# Altium PCB motor-60mm.PcbDoc
Units mm, origin at the board's own origin, x right, y up, seen from the top; angles counter-clockwise.
Board outline 60 x 60 mm, 2 copper layers (Top Layer, Bottom Layer), stack 1.591 mm thick; 22 components, 14 nets, 73 pads, 187 vias.
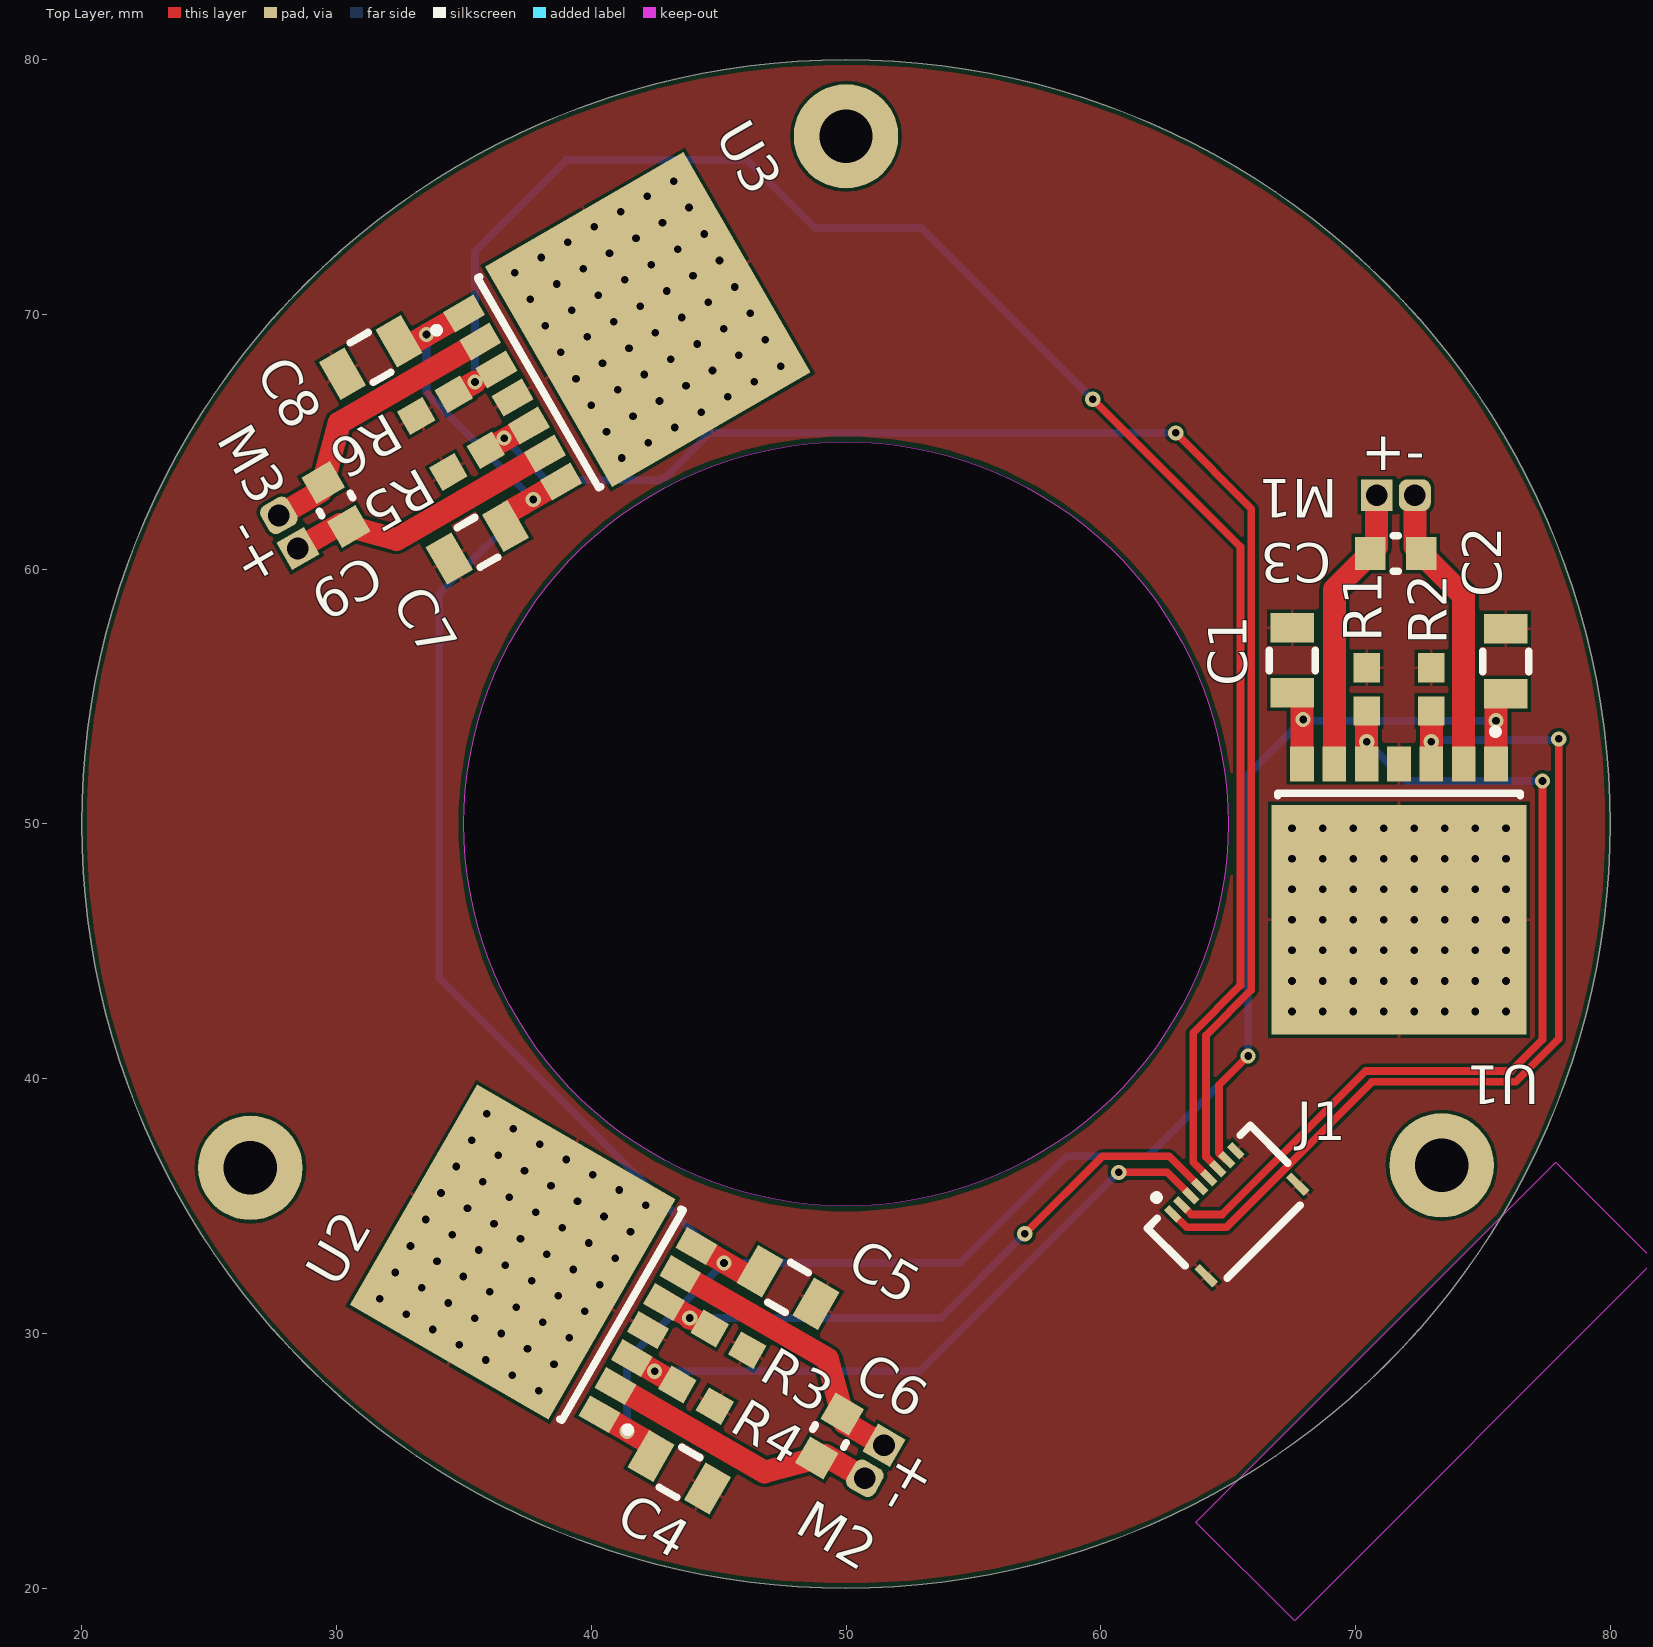
[diagram p0: Top Layer view]
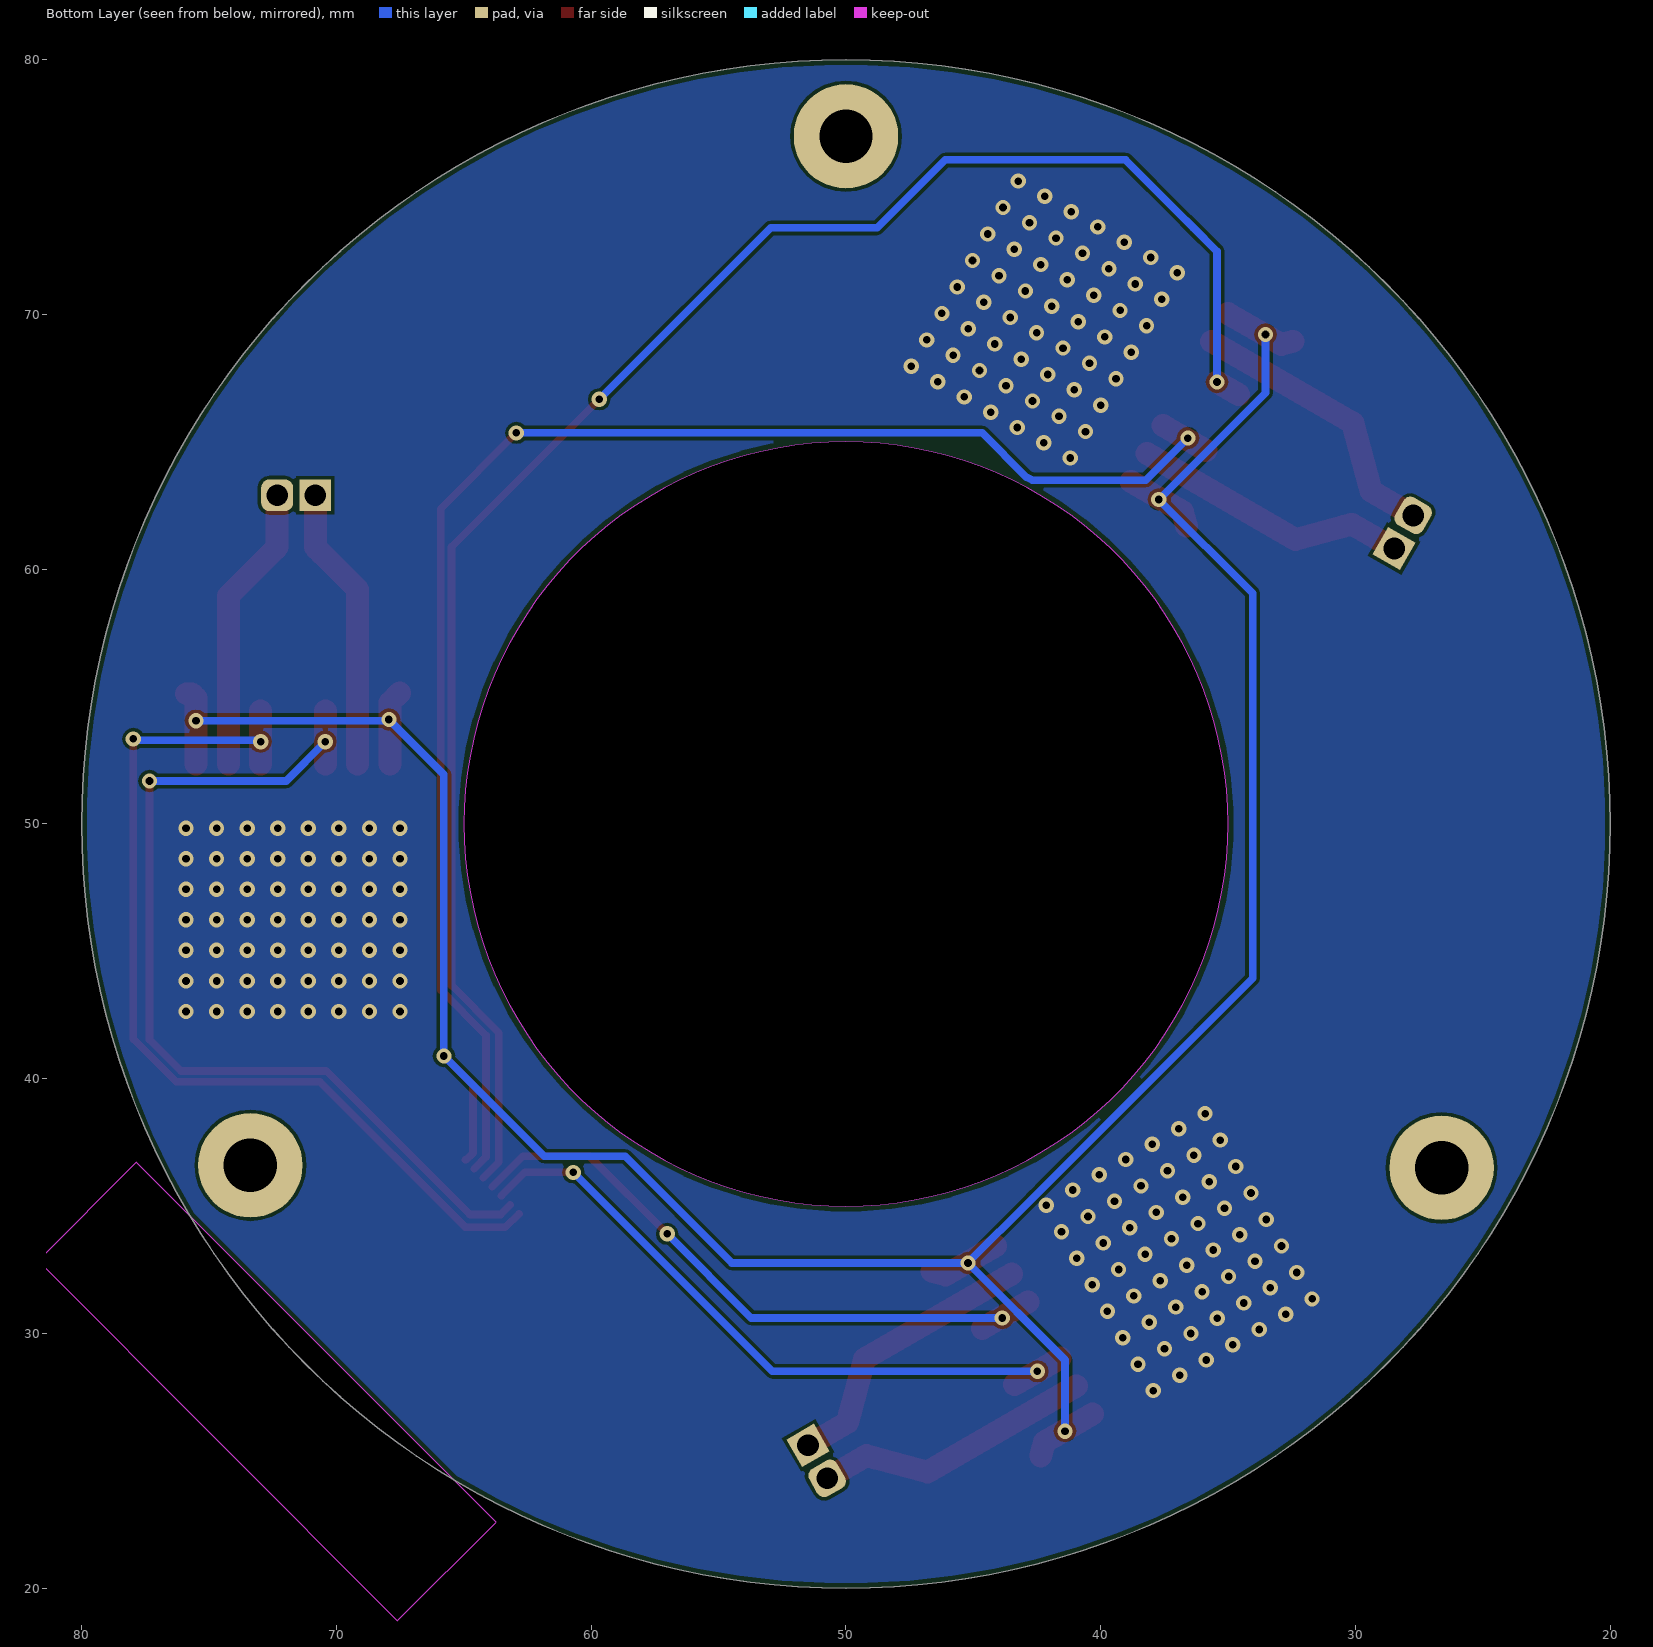
[diagram p1: Bottom Layer view, seen from below]
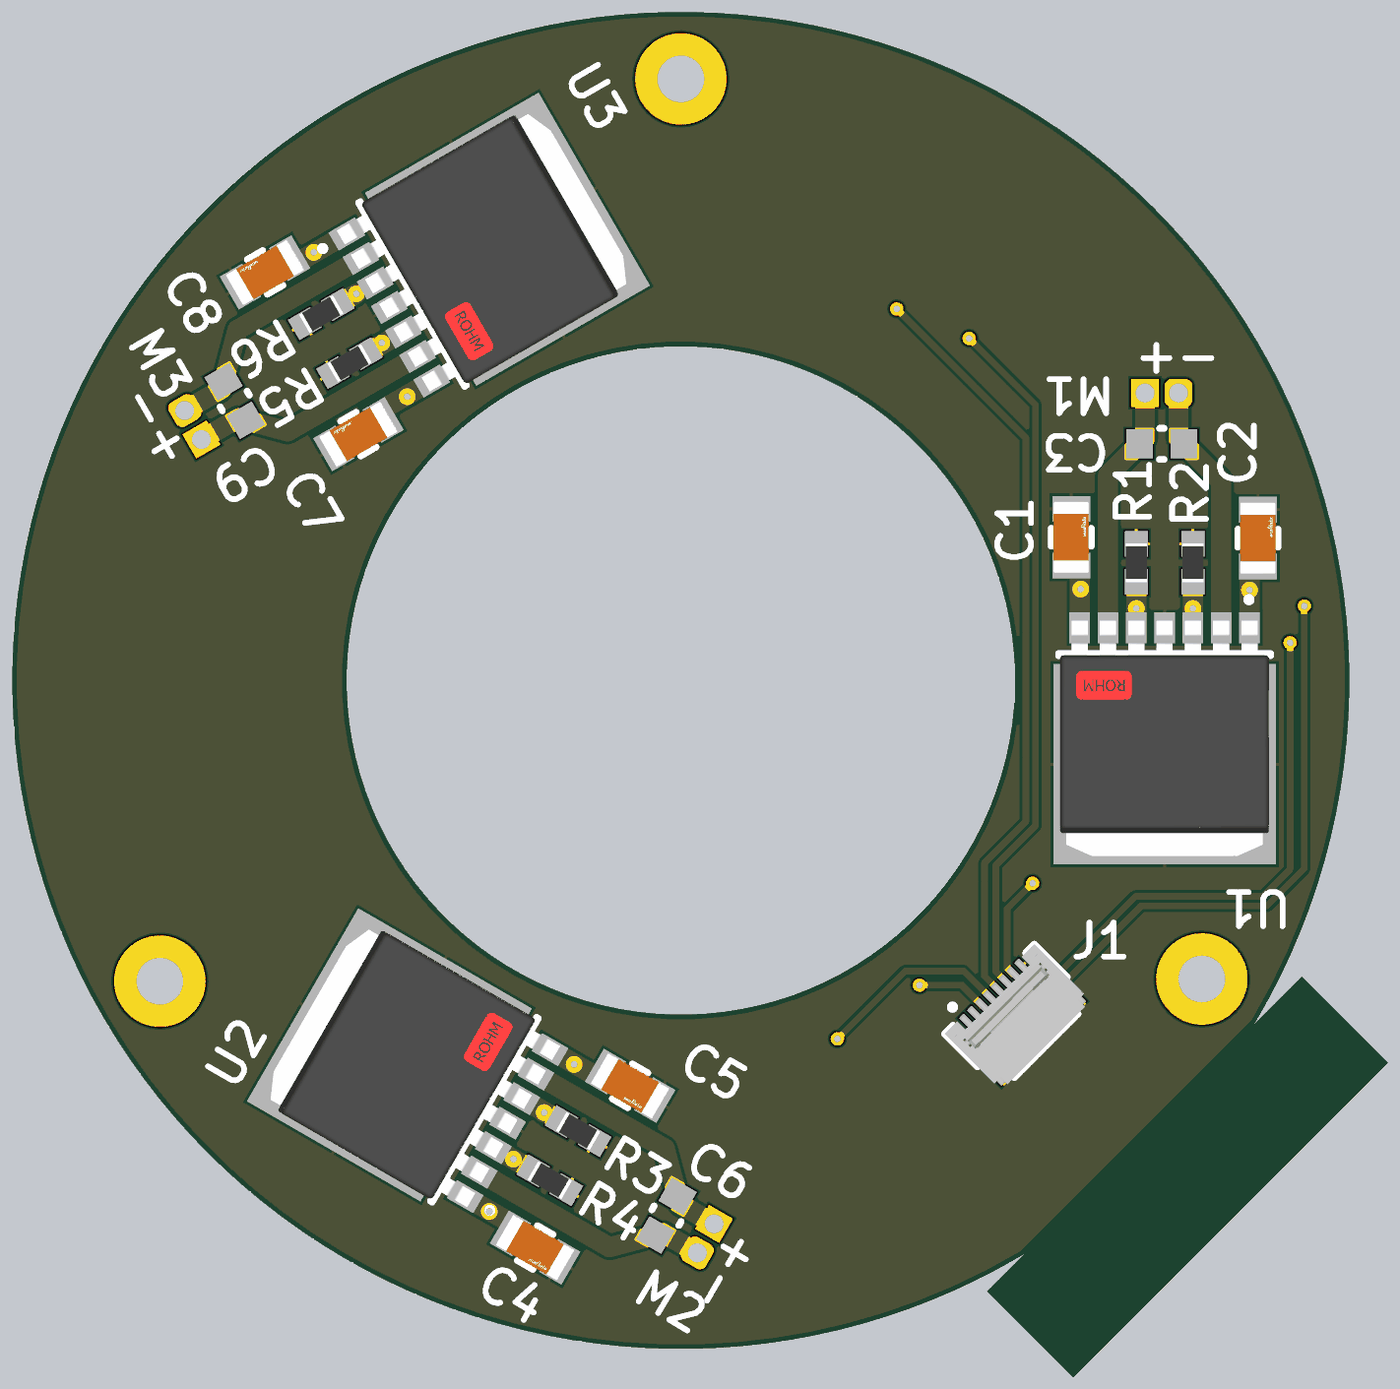
[diagram p2: 3D render of the assembled board from above, using the file's embedded part models]

## Layer stack, top to bottom
Top Solder: solder mask 0.0102, Solder Resist, Dk 3.5
Top Layer: signal copper 0.0356
Dielectric 1: dielectric 1.52, FR-4, Dk 4.8
Bottom Layer: signal copper 0.0356
Bottom Solder: solder mask 0.0102, Solder Resist, Dk 3.5

## Board outline
50,20 cw(c50,50) 20,50 cw(c50,50) 50,80 cw(c50,50) 80,50 cw(c50,50)
cut-out: 50,35 cw(c50,50) 35,50 cw(c50,50) 50,65 cw(c50,50) 65,50 cw(c50,50)
cut-out: 81.74,32.845 67.612,18.717 63.738,22.59 77.867,36.719

## Design rules (kind name [scope] priority, off if disabled: settings)
BoardOutlineClearance [All] p1: gap=0.2 ignorepadtopadclearanceinfootprint=FALSE
Clearance [All] p1: gap=0.127 ignorepadtopadclearanceinfootprint=FALSE except(0.25: Arc-Hole Track-Hole SMDPad-Hole THPad-Hole Via-Hole Fill-Hole Poly-Hole Region-Hole Text-Hole)
ComponentClearance [All] p1: gap=0.127 collisioncheckmode=3 verticalgap=0.127 showdistances=TRUE
DiffPairsRouting [All] p1: maxlimit=0.254 minlimit=0.127 mostfreqgap=0.127 toplayer_minwidth=0.127 toplayer_maxwidth=25.4 toplayer_prefwidth=0.127 bottomlayer_minwidth=0.127 bottomlayer_maxwidth=25.4 bottomlayer_prefwidth=0.127 maxuncoupledlength=12.7
Height [All] p1: minheight=0 maxheight=1816.048 prefheight=12.7
HoleSize [All] p1: absolutevalues=TRUE maxlimit=6.3 minlimit=0.3 maxpercent=80.000 minpercent=20.000
HoleToHoleClearance [All] p1: gap=0.25 allowstackedmicrovias=FALSE
MinimumAnnularRing [All] p1: minimumring=0.076
MinimumSolderMaskSliver [All] p1: minsoldermaskwidth=0
PlaneClearance [All] p1: clearance=0.127
PlaneConnect PlaneConnectPowerPads [InPadClass('PowerPads')] p1: planeconnectstyle=Direct reliefexpansion=0.508 reliefentries=4 reliefconductorwidth=0.254 reliefairgap=0.254
PlaneConnect [All] p2: pad.planeconnectstyle=Relief pad.reliefexpansion=0.3 pad.reliefentries=4 pad.reliefconductorwidth=0.127 pad.reliefairgap=0.127 via.planeconnectstyle=Direct via.reliefexpansion=0.3 via.reliefentries=4 via.reliefconductorwidth=0.127 via.reliefairgap=0.127
PolygonConnect PolygonConnectPowerPads [All vs (InPadClass('PowerPads'))] p1: connectstyle=Direct reliefconductorwidth=0.254 reliefentries=4 polygonreliefangle="90 Angle" airgapwidth=0.254
PolygonConnect [All] p2: thpad.connectstyle=Relief thpad.reliefconductorwidth=0.127 thpad.reliefentries=4 thpad.polygonreliefangle="90 Angle" thpad.airgapwidth=0.127 smdpad.connectstyle=Relief smdpad.reliefconductorwidth=0.127 smdpad.reliefentries=4 smdpad.polygonreliefangle="90 Angle" smdpad.airgapwidth=0.127 via.connectstyle=Direct via.reliefconductorwidth=0.127 via.reliefentries=4 via.polygonreliefangle="90 Angle" via.airgapwidth=0.127
RoutingVias [All] p1: holewidth=0.3 width=0.6 viastyle="Through Hole" minholewidth=0.3 minwidth=0.6 maxholewidth=0.6 maxwidth=6.6
SilkToSilkClearance [All] p1: silktosilkclearance=0
SilkToSolderMaskClearance [IsPad] p1: minsilkscreentomaskgap=0.127 clearancetoexposedcopper=TRUE
SolderMaskExpansion [All] p1: expansion=0.075 istentingtop=FALSE
Width [All] p1: maxlimit=25.4 minlimit=0.127 preferedwidth=0.127 minimp=50.000000 maximp=50.000000 favimp=50.000000
20 further rules are at their usual default settings.

## Components (designator, comment, footprint, x,y, rotation, side; value= is the part's Value field where it differs from the comment)
C1 "GRM31CR60J476ME19L" FP-GRM31C-0_2-e0_3_0_8-IPC_C 67.52,56.427 r90 top
C2 "GRM31CR60J476ME19L" FP-GRM31C-0_2-e0_3_0_8-IPC_C 75.9,56.388 r90 top
C3 "Unpopulated" 2012[0805]_M 71.584,60.618 r0 top
C4 "GRM31CR60J476ME19L" FP-GRM31C-0_2-e0_3_0_8-IPC_C 43.459,24.546 r330 top
C5 "GRM31CR60J476ME19L" FP-GRM31C-0_2-e0_3_0_8-IPC_C 47.722,31.804 r330 top
C6 "Unpopulated" 2012[0805]_M 49.356,25.974 r240 top
C7 "GRM31CR60J476ME19L" FP-GRM31C-0_2-e0_3_0_8-IPC_C 35.529,61.057 r210 top
C8 "GRM31CR60J476ME19L" FP-GRM31C-0_2-e0_3_0_8-IPC_C 31.338,68.316 r210 top
C9 "Unpopulated" 2012[0805]_M 29.977,62.544 r120 top
J1 "503480-0800" MOLX-503480-0800 65,35 r45 top
M1 "DCMotor" CABLE-TERMINAL1x2 71.584,62.904 r0 top
M2 "DCMotor" CABLE-TERMINAL1x2 51.116,24.958 r240 top
M3 "DCMotor" CABLE-TERMINAL1x2 28.107,61.465 r120 top
R1 "ERJ3EKF1002V" RESC1609X55X30ML15T15 70.441,55.284 r270 top
R2 "ERJ3EKF1002V" RESC1609X55X30ML15T15 72.981,55.284 r270 top
R3 "ERJ3EKF1002V" RESC1609X55X30ML15T15 45.388,29.77 r150 top
R4 "ERJ3EKF1002V" RESC1609X55X30ML15T15 44.118,27.57 r150 top
R5 "ERJ3EKF1002V" RESC1609X55X30ML15T15 35.128,64.245 r30 top
R6 "ERJ3EKF1002V" RESC1609X55X30ML15T15 33.858,66.444 r30 top
U1 "BD6210HFP-TR" FP-HRP7-MFG 71.711,47.14 r180 top
U2 "BD6210HFP-TR" FP-HRP7-MFG 37.7,32.742 r60 top
U3 "BD6210HFP-TR" FP-HRP7-MFG 41.436,69.353 r300 top

## Footprints (in the part's own frame and the unit in brackets; to place one, negate y for a bottom-side part, rotate by r counter-clockwise, add the part's x,y. Pads: shape width x height; smd on the part's side, far side on the other; paste and mask are expansions set on the pad)
2012[0805]_M [mm] "Two Terminal Package, Body 2x1.2mm, IPC Low Density"
  rect 1.2x1.3 smd: 1(-1,0) 2(1,0)
  silkscreen extent -0.1,-0.7 0.1,0.7, body extent -1,-0.6 1,0.6, height 1.3
CABLE-TERMINAL1x2 [mm] "Cable to board terminal, 1x2, 1.5mm pitch"
  rect 1.25x1.25 hole 0.85 mask+0.075: 1(-0.75,0)
  rrect50% 1.25x1.25 hole 0.85 mask+0.075: 2(0.75,0)
FP-GRM31C-0_2-e0_3_0_8-IPC_C [mm]
  rect 1.155x1.706 smd paste+0 mask+0: 1(-1.276,0) 2(1.276,0)
  silkscreen extent -0.4,-0.9 0.4,0.9, body extent -1.95,-1 1.95,1, height 0.25
FP-HRP7-MFG [mm]
  rect 0.93x1.37 smd paste+0 mask+0: 1(-3.81,-5.223) 2(-2.54,-5.223) 3(-1.27,-5.223) 4(0,-5.223) 5(1.27,-5.223) 6(2.54,-5.223) 7(3.81,-5.223)
  rect 10x9 smd paste+0 mask+0: 8(0,0.902)
  silkscreen extent -4.76,-6.61 4.76,-3.97, body extent -5.1,-6.01 5.1,5.5, height 0.25
MOLX-503480-0800 [mm] "FPC Connector, 8-Leads, Right Angle, Pitch 0.5 mm, Mated Height 1.0 mm, SMT"
  rect 0.3x0.7 smd: 1(-1.75,1.325) 2(-1.25,1.325) 3(-0.75,1.325) 4(-0.25,1.325) 5(0.25,1.325) 6(0.75,1.325) 7(1.25,1.325) 8(1.75,1.325)
  rect 0.3x1 smd: MP1(-2.54,-1.325) MP2(2.54,-1.325)
  silkscreen extent -2.85,-1.98 2.85,2.35, body extent -2.85,-1.97 2.85,1.63, height 1.91
RESC1609X55X30ML15T15 [mm] "Chip Resistor, 2-Leads, Body 1.75x0.95mm, IPC Low Density"
  rect 1.15x1.05 smd: 1(-0.85,0) 2(0.85,0)
  body extent -0.87,-0.48 0.87,0.48, height 0.55

## Part data
C1 C2 C4 C5 C7 C8: library part CMP-2000-06344-2, "Chip Multilayer Ceramic Capacitors for General Purpose, 1206, 47uF, X5R, 15%, 20%, 6.3V", Capacitance=47uF, Case Code (Imperial)=1206, Case Code (Metric)=3216, Dielectric=X5R, Max Operating Temperature=85°C, Min Operating Temperature=-55°C, Package Quantity=2000, Tolerance=20%, Voltage=6.3V, Case/Package=1206, Depth=1.6mm, Height=1.6mm, Lead Free="Lead Free", Length=3.2mm, Material=Ceramic, Mount="Surface Mount", Packaging="Tape and Reel", Radiation Hardening=No, REACH SVHC="No SVHC", Termination=SMD/SMT, Thickness=0.071inch, Voltage Rating=6.3V, Voltage Rating (DC)=6.3V, Width=0.063inch
C3 C6 C9: library part Capacitor, "Generic Capacitor"
J1: library part CMP-1241-00114-1, "0.5 mm Pitch Easy-On(TM) BackFlip(TM) Type FPC Connector, 1.0 mm Mated Height, Right Angle, SMT, Dual Contact, 8 Circuits, -40 to 85 degC, ELV and RoHS Compliant, Tape and Reel", Current (Max per Contact)=0.5A, Manufacturer=Molex, Voltage (Max)="50V AC (RMS)/DC", Circuits (Loaded)=8, ComponentLink1Description="Manufacturer URL", ComponentLink1URL=http://www.molex.com/molex/index.jsp, ComponentLink2Description=Datasheet, ComponentLink2URL=http://www.molex.com/webdocs/datasheets/pdf/en-us/5034800800_FFC_FPC_CONNECTORS.pdf, ComponentLink3Description="Package Specification", ComponentLink3URL=http://www.molex.com/pdm_docs/sd/5034800800_sd.pdf, Contact Position=Dual, Durability (mating cycles max)=10, Entry Angle="90degrees Angle", Mated Height=1.00mm, Material - Metal="Phosphor Bronze", Material - Plating Mating=Gold, Material - Plating Termination="Gold, Tin", Mounting Technology="Surface Mount", Number of Rows=1, Orientation="Right Angle", PackageDescription="8-Lead FPC Connector, Pitch 0.5 mm", PackageReference=503480-0800, PackageVersion="Rev. F, 09/2012", Packing="Tape and Reel", PartNumber=503480-0800, PCB Locator=No, PCB Retention=Yes, Pitch - Mating Interface=0.50mm, Polarized to PCB=Yes, RoHS=TRUE, Stackable=No
M1 M2 M3: library part CMP-034-000000-1, "Generic DC motor", Design Item ID=DCMotor, Source=Motor.SchLib
R1 R2 R3 R4 R5 R6: library part CMP-1012-00623-3, "Chip Resistor, 10 KOhm, +/- 1%, 0.1 W, -55 to 155 degC, 0603 (1608 Metric), RoHS, Tape and Reel", Case Code (Imperial)=0603, Case Code (Metric)=1608, Manufacturer=Panasonic, Max Operating Temperature=155degC, Max Power Dissipation=100mW, Min Operating Temperature=-55degC, Package Description="2-Pin Surface Mount Device, Body 1.6 x 0.85 mm", Package Quantity=1, Package Reference=603, Resistance=10KOhm, Temperature Coefficient=100ppm\/degreesC, Tolerance=1%, Voltage Rating=75V, Case\/Package=0603, Composition=ThickFilm, Contact Plating=Tin, Datasheet URL=https://industrial.panasonic.com/cdbs/www-data/pdf/RDA0000/AOA0000C304.pdf, Datasheet Version=02/2017, Depth=0.8mm, Height=0.45mm, Lead Free=LeadFree, Length=1.6mm, Manufacturer URL=http://www.panasonic.com/, Military Standard=Not, Mount=SurfaceMount, Mounting Technology=SurfaceMount, Number of Pins=2, Number of Terminations=2, Packaging=TapeandReel, Power Rating=100mW, Radiation Hardening=No, REACH SVHC=NoSVHC, RoHSCompliant=true, Termination=SMD/SMT, Voltage Rating (DC)=75V, Width=0.031inch
U1 U2 U3: library part CMP-08935-000017-1, "IC MOTOR DRIVER 3V-5.5V HRP7", Case/Package=TO-263-8, Max Operating Temperature=85°C, Max Supply Voltage=5.5V, Min Operating Temperature=-40°C, Nominal Supply Current=1.5mA, Output Current=500mA, Package Quantity=2000, Interface=On/Off, Lead Free="Lead Free", Logic Function="AND GATE", Mount="Surface Mount", Number Of Outputs=1, Number of Pins=8, Packaging="Tape and Reel", Radiation Hardening=No, RoHS Compliant=Yes, Supply Current=1.5mA

## Free pads (board coordinates)
  round 4.1 hole 2.1: 1(50,77) 2(26.617,36.5) 3(73.383,36.6)

## Via types
v1: diameter 0.6, hole 0.3, Top Layer to Bottom Layer, 187 vias

## Nets (pads, with @x,y where several pads share a name; then routed paths per layer and width w, separated by ;. In a path a pad name is that pad's centre, name@x,y a point inside that pad or via, vN(x,y) a via of type N, cw(c..) or ccw(c..) an arc to the next point about the centre after c; other vN are vias at no path point)
3V3: C1.1 C2.1 C4.1 C5.1 C7.1 C8.1 J1.7 U1.1 U1.7 U2.1 U2.7 U3.1 U3.7 | length 120.2
  Top Layer w0.3: J1.7 64.906,36.821 64.643,37.084 64.643,39.751 v1(65.786,40.894)
  Top Layer w0.9: C8.1 32.908,68.829 33.54,69.194 U3.1 ; C7.1 36.788,62.27 37.689,62.79 U3.7 ; U2.1 41.421,26.194 42.204,25.742 C4.1 ; U2.7 45.229,32.795 46.086,32.299 C5.1 ; C1.1 67.901,54.77 U1.7 ; U1.1 v1(75.521,54.058) 75.521,54.947 75.686,55.112 C2.1
  Bottom Layer w0.3: v1(33.528,69.215) 33.528,66.929 v1(37.719,62.738) 34.036,59.055 34.036,51.081 34.036,43.942 42.371,35.607 42.376,35.607 42.714,35.269 42.714,35.264 v1(45.212,32.766) ; v1(41.402,26.162) 41.402,28.956 v1(45.212,32.766) ; v1(75.521,54.058) 67.989,54.058 v1(67.945,54.102) 65.786,51.943 v1(65.786,40.894) 61.849,36.957 58.674,36.957 54.483,32.766 v1(45.212,32.766)
GND: C1.2 C2.2 C4.2 C5.2 C7.2 C8.2 J1.8 J1.MP1 J1.MP2 R1.1 R2.1 R3.1 R4.1 R5.1 R6.1 U1.4 U1.8 U2.4 U2.8 U3.4 U3.8
  other v1: 37.937,27.755 36.898,28.355 38.537,28.795 35.858,28.955 37.498,29.395 34.819,29.555 39.137,29.834 36.458,29.995 33.78,30.155 38.098,30.434 35.419,30.595 32.741,30.755 39.737,30.873 37.058,31.034 34.38,31.195 31.702,31.355 38.698,31.473 36.019,31.634 33.341,31.795 40.337,31.912 37.658,32.073 34.98,32.234 32.302,32.395 39.298,32.512 36.619,32.673 33.941,32.834 40.937,32.952 38.258,33.112 35.58,33.273 32.902,33.434 39.898,33.552 37.219,33.712 34.541,33.873 41.537,33.991 38.858,34.152 36.18,34.312 33.502,34.473 40.498,34.591 37.819,34.752 35.141,34.912 42.137,35.03 39.458,35.191 36.78,35.352 34.102,35.512 41.098,35.63 38.419,35.791 35.741,35.952 40.058,36.23 37.38,36.391 34.702,36.552 39.019,36.83 36.341,36.991 37.98,37.43 35.302,37.591 36.941,38.03 35.902,38.63 67.511,42.638 68.711,42.638 69.911,42.638 71.111,42.638 72.311,42.638 73.511,42.638 74.711,42.638 75.911,42.638 67.511,43.838 68.711,43.838 69.911,43.838 71.111,43.838 72.311,43.838 73.511,43.838 74.711,43.838 75.911,43.838 67.511,45.038 68.711,45.038 69.911,45.038 71.111,45.038 72.311,45.038 73.511,45.038 74.711,45.038 75.911,45.038 67.511,46.238 68.711,46.238 69.911,46.238 71.111,46.238 72.311,46.238 73.511,46.238 74.711,46.238 75.911,46.238 67.511,47.438 68.711,47.438 69.911,47.438 71.111,47.438 72.311,47.438 73.511,47.438 74.711,47.438 75.911,47.438 67.511,48.638 68.711,48.638 69.911,48.638 71.111,48.638 72.311,48.638 73.511,48.638 74.711,48.638 75.911,48.638 67.511,49.838 68.711,49.838 69.911,49.838 71.111,49.838 72.311,49.838 73.511,49.838 74.711,49.838 75.911,49.838 41.2,64.367 42.239,64.967 40.6,65.406 43.278,65.567 41.639,66.006 44.317,66.167 40,66.445 42.678,66.606 45.356,66.767 41.039,67.045 43.717,67.206 46.396,67.367 39.4,67.484 42.078,67.645 44.756,67.806 47.435,67.967 40.439,68.084 43.117,68.245 45.796,68.406 38.8,68.524 41.478,68.684 44.156,68.845 46.835,69.006 39.839,69.124 42.517,69.284 45.196,69.445 38.2,69.563 40.878,69.724 43.556,69.884 46.235,70.045 39.239,70.163 41.917,70.324 44.596,70.484 37.6,70.602 40.278,70.763 42.956,70.924 45.635,71.084 38.639,71.202 41.317,71.363 43.996,71.524 37,71.641 39.678,71.802 42.356,71.963 45.035,72.124 38.039,72.241 40.717,72.402 43.396,72.563 39.078,72.841 41.756,73.002 44.435,73.163 40.117,73.441 42.796,73.602 41.156,74.041 43.835,74.202 42.196,74.641 43.235,75.241
NetC3_1: C3.1 M1.1 U1.6 | length 11.2
  Top Layer w0.9: U1.6 69.171,59.205 C3.1 70.834,60.868 M1.1
NetC3_2: C3.2 M1.2 U1.2 | length 11.3
  Top Layer w0.9: M1.2 72.334,60.868 C3.2 74.251,58.951 U1.2
NetC6_1: C6.1 M2.1 U2.6 | length 11
  Top Layer w0.9: U2.6 49.28,28.989 C6.1 49.947,26.499 M2.1
NetC6_2: C6.2 M2.2 U2.2 | length 11
  Top Layer w0.9: U2.2 46.798,24.557 C6.2 49.197,25.2 M2.2
NetC9_1: C9.1 M3.1 U3.6 | length 10.9
  Top Layer w0.9: M3.1 30.136,61.77 C9.1 32.352,61.176 U3.6
NetC9_2: C9.2 M3.2 U3.2 | length 11.1
  Top Layer w0.9: M3.2 29.386,63.069 C9.2 30.102,65.742 U3.2
NetJ1_1: J1.1 R2.2 U1.3 | length 37.3
  Top Layer w0.3: J1.1 62.837,34.699 63.373,34.163 64.938,34.163 70.653,39.878 76.296,39.878 77.978,41.56 v1(77.978,53.34)
  Top Layer w0.9: U1.3 72.981,53.398 R2.2
  Bottom Layer w0.3: v1(72.981,53.231) 73.036,53.285 77.923,53.285 v1(77.978,53.34)
NetJ1_2: J1.2 R1.2 U1.5 | length 36.9
  Top Layer w0.3: J1.2 63.561,34.671 64.77,34.671 70.404,40.305 76.119,40.305 77.343,41.529 v1(77.343,51.689)
  Top Layer w0.9: U1.5 70.441,53.398 R1.2
  Bottom Layer w0.3: v1(70.441,53.231) 71.983,51.689 v1(77.343,51.689)
NetJ1_3: J1.3 R4.2 U2.3 | length 26.7
  Top Layer w0.3: v1(60.706,36.322) 62.611,36.322 63.526,35.407 J1.3
  Top Layer w0.9: U2.3 v1(42.485,28.513) R4.2
  Bottom Layer w0.3: v1(42.485,28.513) 52.897,28.513 v1(60.706,36.322)
NetJ1_4: J1.4 R3.2 U2.5 | length 25.3
  Top Layer w0.3: v1(57.023,33.909) 60.071,36.957 62.689,36.957 J1.4
  Top Layer w0.9: U2.5 43.755,30.712 43.883,30.639 R3.2 ; v1(43.865,30.603) 43.885,30.623 v1@43.885,30.638
  Bottom Layer w0.3: v1(43.865,30.603) 53.717,30.603 v1(57.023,33.909)
NetJ1_5: J1.5 R6.2 U3.3 | length 69.7
  Top Layer w0.3: v1(59.69,66.675) 65.486,60.879 65.486,43.662 63.627,41.803 63.627,36.727 J1.5
  Top Layer w0.9: R6.2 v1(35.436,67.355)
  Bottom Layer w0.3: v1(35.436,67.355) 35.436,72.48 36.374,73.418 36.974,74.018 39.029,76.073 46.101,76.073 48.768,73.406 52.959,73.406 v1(59.69,66.675)
NetJ1_6: J1.6 R5.2 U3.5 | length 62
  Top Layer w0.3: v1(36.576,65.151) 37.067,65.642 U3.5 ; v1(62.941,65.354) 65.913,62.382 65.913,43.485 64.135,41.707 64.135,36.926 J1.6
  Top Layer w0.9: R5.2 36.606,65.098 37.187,65.433 U3.5
  Bottom Layer w0.3: v1(36.576,65.151) 38.227,63.5 42.684,63.5 42.919,63.62 44.653,65.354 v1(62.941,65.354)

## Polygon pours and split planes (outlines as drawn)
GND on Top Layer "GND_L01_P000" (solid, pour order 0): 50,20 cw(c50,50) 20,50 cw(c50,50) 50,80 cw(c50,50) 80,50 cw(c50,50)
GND on Bottom Layer "GND_L02_P001" (solid, pour order 1): 50,20 cw(c50,50) 20,50 cw(c50,50) 50,80 cw(c50,50) 80,50 cw(c50,50)

## Silkscreen, mask and mechanical layers (free items; w line width, h text height)
Top Overlay:
  text "+-" at 70.231,63.881 h1.52
  text "+-" at 27.94,59.91 h1.52 r120
  text "+-" at 52.451,25.561 h1.52 r240
Mechanical 1:
  drawing of 382 lines, arcs and shapes, not listed